# EAGLE board untitled (EAGLE 5.09)

No outline drawn. Coordinates in mm, seen from the top.
Copper layers (1*16): Top 0.035mm / dielectric 1.5mm / Bottom 0.035mm
Design rules "default": minimum track width 10mil, minimum drill 24mil, track to track 8mil, track to pad 8mil, pad to pad 8mil, via to via 8mil, smd to smd 8mil, copper to edge 40mil, drill to drill 8mil, minimum pad ring 10mil, minimum via ring 8mil, stop-mask expansion 4mil, vias tented up to drill 0mil, thermal gap 10mil

## Footprints (pad centres in the part's own frame; a part is rotated, then mirrored left to right if it is on the bottom)
SX23-XX = drill 0.813 long: 1 18.923,5.08; 2 21.463,5.08; 3 24.003,5.08; 4 26.543,5.08; 5 29.083,5.08; 6 29.083,65.024; 7 26.543,65.024; 8 24.003,65.024; 9 21.463,65.024; 10 18.923,65.024
HDSP-M = drill 0.813 long: 1 -5.08,-7.62; 2 -2.54,-7.62; 3 0,-7.62; 4 2.54,-7.62; 5 5.08,-7.62; 6 5.08,7.62; 7 2.54,7.62; 8 0,7.62; 9 -2.54,7.62; 10 -5.08,7.62
DIL16 = drill 0.813 long: 1 -8.89,-3.81; 2 -6.35,-3.81; 3 -3.81,-3.81; 4 -1.27,-3.81; 5 1.27,-3.81; 6 3.81,-3.81; 7 6.35,-3.81; 8 8.89,-3.81; 9 8.89,3.81; 10 6.35,3.81; 11 3.81,3.81; 12 1.27,3.81; 13 -1.27,3.81; 14 -3.81,3.81; 15 -6.35,3.81; 16 -8.89,3.81
DIL14 = drill 0.813 long: 1 -7.62,-3.81; 2 -5.08,-3.81; 3 -2.54,-3.81; 4 0,-3.81; 5 2.54,-3.81; 6 5.08,-3.81; 7 7.62,-3.81; 8 7.62,3.81; 9 5.08,3.81; 10 2.54,3.81; 11 0,3.81; 12 -2.54,3.81; 13 -5.08,3.81; 14 -7.62,3.81
LED5MM = drill 0.813 octagon: A -1.27,0; K 1.27,0
LED10MM = drill 0.813 pad 1.676 octagon: A -1.27,0 | drill 0.813 pad 1.676 square: K 1.27,0

## Placement (x,y rotation side)
DIS1  SA23-11  [SX23-XX]  -63.5,3.81 0 top
DIS2  SA23-11  [SX23-XX]  -111.76,3.81 0 top
DIS3  SA23-11  [SX23-XX]  -160.02,3.81 0 top
DIS4  SA23-11  [SX23-XX]  -208.28,3.81 0 top
DIS5  HD-H103  [HDSP-M]  -74.93,-8.89 0 top
DIS6  HD-H103  [HDSP-M]  -92.71,-8.89 0 top
DIS7  HD-H103  [HDSP-M]  -111.76,-8.89 0 top
DIS8  HD-H103  [HDSP-M]  -130.81,-8.89 0 top
DIS9  HD-H103  [HDSP-M]  -147.32,-8.89 0 top
IC1  4060N  [DIL16]  -177.8,180.34 0 top
IC2  74HC163N  [DIL16]  -24.13,181.61 0 top
IC3  74HC163N  [DIL16]  -46.99,181.61 0 top
IC5  74LS47N  [DIL16]  -69.85,181.61 0 top
IC6  74LS47N  [DIL16]  -92.71,181.61 0 top
IC7  74LS47N  [DIL16]  -115.57,181.61 0 top
IC8  74LS47N  [DIL16]  -138.43,181.61 0 top
IC10  74HC162N  [DIL16]  -24.13,194.31 0 top
IC11  74HC162N  [DIL16]  -46.99,194.31 0 top
IC12  74HC20N  [DIL14]  -114.3,194.31 0 top
IC13  74HC162N  [DIL16]  -69.85,194.31 0 top
IC14  74HC162N  [DIL16]  -92.71,194.31 0 top
IC15  74HC14N  [DIL14]  -134.62,194.31 0 top
LED1  [LED5MM]  -39.37,204.47 0 top
LED2  [LED5MM]  -52.07,204.47 0 top
LED3  [LED10MM]  -157.48,194.31 0 top
LED4  [LED10MM]  -24.13,207.01 0 top

## Library data of the parts
DIS1-DIS4 = display-kingbright
DIS5-DIS9 = display-hp
IC1 = 40xx
IC2 IC3 IC5-IC8 IC10-IC15 = 74xx-eu
LED1-LED4 = led

## Nets
!LD: IC10.9 IC11.9 IC13.9 IC14.9
!RCO2: IC12.10 IC13.10 IC15.2
+12V: DIS1.1 DIS1.5 DIS2.1 DIS2.5 DIS3.1 DIS3.5 DIS4.1 DIS4.5
CLK: IC10.2 IC11.2 IC13.2 IC14.2
GND: IC2.4 IC2.5 IC2.6 IC2.8 IC3.3 IC3.4 IC3.5 IC3.6 IC3.8 IC5.8 IC6.8 IC7.8 IC8.8 IC10.8 IC11.8 IC12.7 IC13.8 IC14.8 IC15.7
LD: IC12.1
LD0: IC10.3 IC11.3 IC13.3 IC14.3
LD1: IC10.4 IC11.4 IC13.4 IC14.4
LD2: IC10.5 IC11.5 IC13.5 IC14.5
LD3: IC10.6 IC11.6 IC13.6 IC14.6
N$1: IC2.9 IC15.6
N$2: IC2.15 IC15.5
N$3: IC2.2 IC3.12
N$5: DIS2.10 IC5.14
N$6: DIS2.9 IC5.15
N$7: DIS2.3 IC5.10
N$8: DIS2.6 IC5.12
N$9: DIS2.7 IC5.13
N$10: DIS2.4 IC5.11
N$11: DIS2.2 IC5.9
N$24: DIS4.10 IC8.14
N$25: DIS4.9 IC8.15
N$26: DIS4.3 IC8.10
N$27: DIS4.6 IC8.12
N$28: DIS4.7 IC8.13
N$29: DIS4.4 IC8.11
N$30: DIS4.2 IC8.9
N$31: DIS1.10 IC7.14
N$32: DIS1.9 IC7.15
N$33: DIS1.3 IC7.10
N$34: DIS1.6 IC7.12
N$35: DIS1.7 IC7.13
N$36: DIS1.4 IC7.11
N$37: DIS1.2 IC7.9
N$38: DIS3.10 IC6.14
N$39: DIS3.9 IC6.15
N$40: DIS3.3 IC6.10
N$41: DIS3.6 IC6.12
N$42: DIS3.7 IC6.13
N$43: DIS3.4 IC6.11
N$44: DIS3.2 IC6.9
Q0: IC8.7 IC10.14
Q1: IC8.1 IC10.13
Q2: IC8.2 IC10.12
Q3: IC8.6 IC10.11
Q4: IC6.7 IC11.14 IC12.5
Q5: IC6.1 IC11.13
Q6: IC6.2 IC11.12 IC12.4
Q7: IC6.6 IC11.11
Q8: IC5.7 IC12.12 IC13.14
Q9: IC5.1 IC12.13 IC13.13
Q10: IC5.2 IC13.12
Q11: IC5.6 IC13.11
Q12: IC7.7 IC14.14
Q13: IC7.1 IC12.9 IC14.13
Q14: IC7.2 IC14.12
Q15: IC7.6 IC14.11
RCO1: IC10.15 IC11.7 IC12.2
RCO2: IC11.1 IC12.6 IC15.1
RCO3: IC13.15 IC14.7
RCO4: IC12.8 IC13.1 IC14.1
VCC: IC2.1 IC2.3 IC2.7 IC2.10 IC2.16 IC3.1 IC3.7 IC3.9 IC3.10 IC3.16 IC5.16 IC6.16 IC7.16 IC8.16 IC10.1 IC10.7 IC10.10 IC10.16 IC11.10 IC11.16 IC12.14 IC13.7 IC13.16 IC14.10 IC14.16 IC15.14
VDD: IC1.16
VSS: IC1.8

## Tracks (layer width: path | path; a pad name or v marks a point on that pad's centre or on a via)
!LD  (3 unrouted)
!RCO2  (2 unrouted)
+12V  (7 unrouted)
CLK  (3 unrouted)
GND  (18 unrouted)
LD0  (3 unrouted)
LD1  (3 unrouted)
LD2  (3 unrouted)
LD3  (3 unrouted)
N$1  (1 unrouted)
N$2  (1 unrouted)
N$3  (1 unrouted)
N$5  (1 unrouted)
N$6  (1 unrouted)
N$7  (1 unrouted)
N$8  (1 unrouted)
N$9  (1 unrouted)
N$10  (1 unrouted)
N$11  (1 unrouted)
N$24  (1 unrouted)
N$25  (1 unrouted)
N$26  (1 unrouted)
N$27  (1 unrouted)
N$28  (1 unrouted)
N$29  (1 unrouted)
N$30  (1 unrouted)
N$31  (1 unrouted)
N$32  (1 unrouted)
N$33  (1 unrouted)
N$34  (1 unrouted)
N$35  (1 unrouted)
N$36  (1 unrouted)
N$37  (1 unrouted)
N$38  (1 unrouted)
N$39  (1 unrouted)
N$40  (1 unrouted)
N$41  (1 unrouted)
N$42  (1 unrouted)
N$43  (1 unrouted)
N$44  (1 unrouted)
Q0  (1 unrouted)
Q1  (1 unrouted)
Q2  (1 unrouted)
Q3  (1 unrouted)
Q4  (2 unrouted)
Q5  (1 unrouted)
Q6  (2 unrouted)
Q7  (1 unrouted)
Q8  (2 unrouted)
Q9  (2 unrouted)
Q10  (1 unrouted)
Q11  (1 unrouted)
Q12  (1 unrouted)
Q13  (2 unrouted)
Q14  (1 unrouted)
Q15  (1 unrouted)
RCO1  (2 unrouted)
RCO2  (2 unrouted)
RCO3  (1 unrouted)
RCO4  (2 unrouted)
VCC  (25 unrouted)